# EAGLE board pcb (EAGLE 9.6.2)
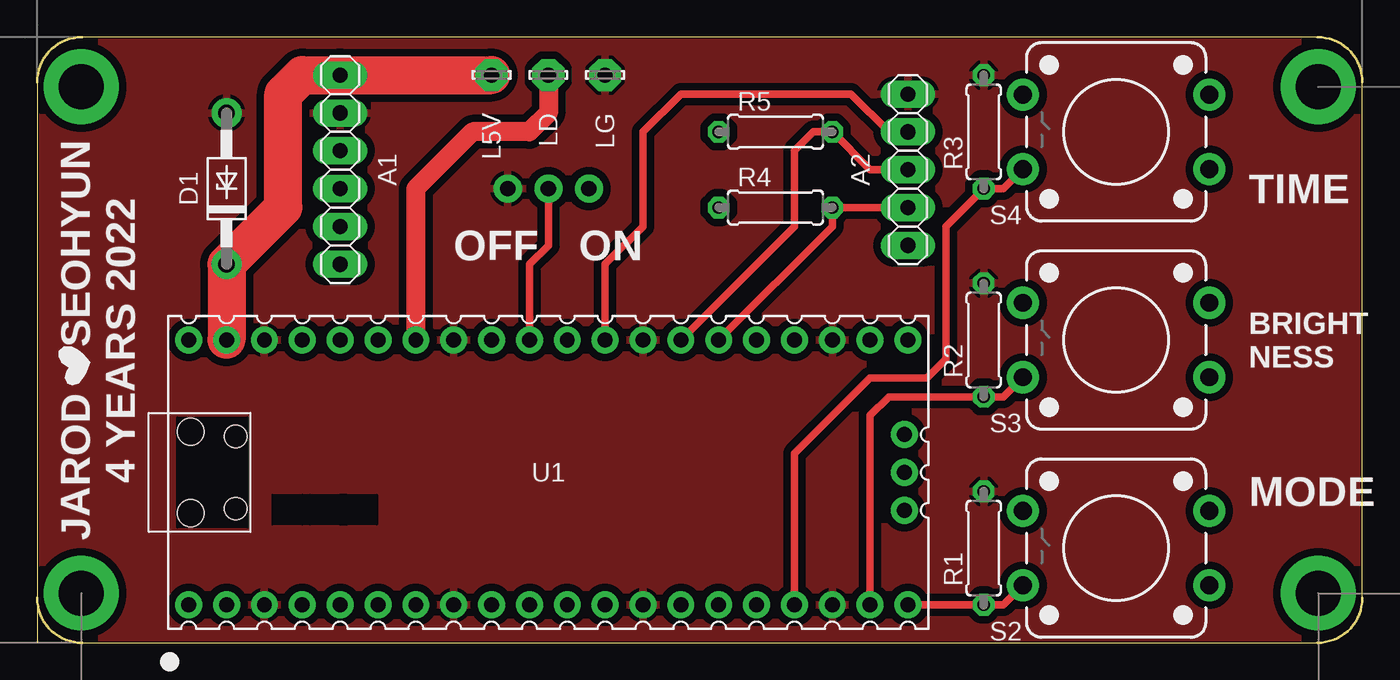
[diagram p0: board, top side]
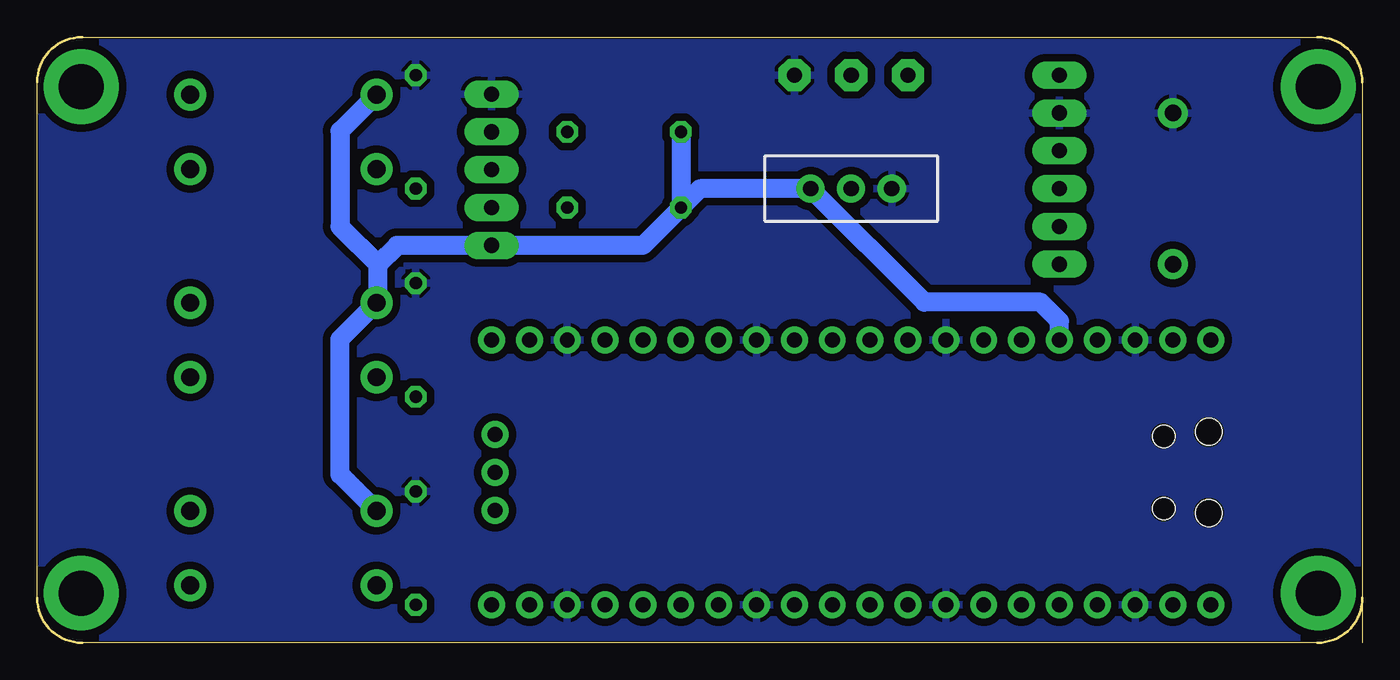
[diagram p1: board, bottom side, seen from below]

Size 88.9 x 40.64 mm. Coordinates in mm from the lower left corner, seen from the top.
Outline: 0,3 0,37.64 arc-90 3,40.64 85.9,40.64 arc-90 88.9,37.64 88.9,3 arc-90 85.9,0 3,0 arc-90 0,3
Outline: 0,3 0,0
Copper layers (1*16): Top 0.035mm / dielectric 1.6mm / Bottom 0.035mm
Design rules "jlcpcb-2layers *": minimum track width 5mil, minimum drill 0.3mm, track to track 20mil, track to pad 20mil, pad to pad 5mil, via to via 5mil, smd to smd 5mil, copper to edge 0.1mm, drill to drill 6mil, minimum pad ring 10mil, minimum via ring 3mil, stop-mask expansion 4mil, vias tented up to drill 0mil, thermal gap 10mil

## Footprints (pad centres in the part's own frame; a part is rotated, then mirrored left to right if it is on the bottom)
1X06 = drill 1.016 long: 1 -6.35,0; 2 -3.81,0; 3 -1.27,0; 4 1.27,0; 5 3.81,0; 6 6.35,0
1X05 = drill 1.016 long: 1 -5.08,0; 2 -2.54,0; 3 0,0; 4 2.54,0; 5 5.08,0
DO41Z10 = drill 1.118: A 5.08,0; C -5.08,0
LSP10 = drill 1.016 pad 2.159 octagon: MP 0,0
0207/7 = drill 0.813 octagon: 1 -3.81,0; 2 3.81,0
SWITCH_SPDT_PTH_11.6X4.0MM_LOCK = drill 1.016 pad 1.88: 1 0,2.718; 2 0,0; 3 0,-2.718
TACTILE_SWITCH_PTH_12MM = drill 1.2 pad 2.159: 1 6.25,-2.5; 2 -6.25,-2.5; 3 6.25,2.5; 4 -6.25,2.5
PICO-PKG-TH = drill 1: 1 -8.89,24.13; 2 -8.89,21.59; 3 -8.89,19.05; 4 -8.89,16.51; 5 -8.89,13.97; 6 -8.89,11.43; 7 -8.89,8.89; 8 -8.89,6.35; 9 -8.89,3.81; 10 -8.89,1.27; 11 -8.89,-1.27; 12 -8.89,-3.81; 13 -8.89,-6.35; 14 -8.89,-8.89; 15 -8.89,-11.43; 16 -8.89,-13.97; 17 -8.89,-16.51; 18 -8.89,-19.05; 19 -8.89,-21.59; 20 -8.89,-24.13; 21 8.89,-24.13; 22 8.89,-21.59; 23 8.89,-19.05; 24 8.89,-16.51; 25 8.89,-13.97; 26 8.89,-11.43; 27 8.89,-8.89; 28 8.89,-6.35; 29 8.89,-3.81; 30 8.89,-1.27; 31 8.89,1.27; 32 8.89,3.81; 33 8.89,6.35; 34 8.89,8.89; 35 8.89,11.43; 36 8.89,13.97; 37 8.89,16.51; 38 8.89,19.05; 39 8.89,21.59; 40 8.89,24.13; 41 -2.54,-23.9; 42 0,-23.9; 43 2.54,-23.9 | hole 1.8: -2.725,24; 2.725,24 | hole 1.5: -2.425,20.97; 2.425,20.97

## Placement (x,y rotation side)
A1  [1X06]  20.32,31.75 270 top
A2  [1X05]  58.42,31.75 90 top
D1  1N4728  [DO41Z10]  12.7,30.48 90 top
L5V  LSP10  [LSP10]  30.48,38.1 0 top
LD  LSP10  [LSP10]  34.29,38.1 0 top
LG  LSP10  [LSP10]  38.1,38.1 0 top
R1  [0207/7]  63.5,6.35 90 top
R2  [0207/7]  63.5,20.32 90 top
R3  [0207/7]  63.5,34.29 90 top
R4  [0207/7]  49.53,29.21 0 top
R5  [0207/7]  49.53,34.29 0 top
S1  [SWITCH_SPDT_PTH_11.6X4.0MM_LOCK]  34.29,30.48 90 bottom
S2  MOMENTARY-SWITCH-SPST-PTH-12MM  [TACTILE_SWITCH_PTH_12MM]  72.39,6.35 180 top
S3  MOMENTARY-SWITCH-SPST-PTH-12MM  [TACTILE_SWITCH_PTH_12MM]  72.39,20.32 180 top
S4  MOMENTARY-SWITCH-SPST-PTH-12MM  [TACTILE_SWITCH_PTH_12MM]  72.39,34.29 180 top
U1  RASPBERRY_PICOTH  [PICO-PKG-TH]  34.29,11.43 90 top

## Library data of the parts
A1 A2 = pinhead
D1 = diode
L5V LD LG = solpad
R1-R5 = rcl; SPICEPREFIX: R
S1 = SparkFun-Switches; PROD_ID: SWCH-08261; SF_SKU: COM-00102
S2-S4 = SparkFun-Switches; PROD_ID: SWCH-09185; SF_SKU: COM-09190
U1 = RpiPico

## Nets
3V3: A2.1 R4.1 R5.1 S1.1 S2.1 S3.1 S4.1 U1.36
GND: A1.2 A2.5 D1.A LG.MP R1.2 R2.2 R3.2 S1.3 U1.3 U1.8 U1.13 U1.18 U1.23 U1.28 U1.33 U1.38
INT: A2.4 U1.29
LEDDATA: LD.MP U1.34
SCL: A2.3 R5.2 U1.27
SDA: A2.2 R4.2 U1.26
SW1: S1.2 U1.31
SW2: R1.1 S2.3 U1.20
SW3: R2.1 S3.3 U1.19
SW4: R3.1 S4.3 U1.17
SWGND: U1.42
VBUS: U1.40
VCC: A1.1 D1.C L5V.MP U1.39

## Tracks (layer width: path | path; a pad name or v marks a point on that pad's centre or on a via)
3V3
  Bottom 1.27: R5.1 R4.1 | S4.1 68.58,34.35 68.58,27.94 66.04,25.4 | S2.1 68.58,11.29 68.58,20.38 S3.1 | S3.1 66.18,22.86 | R4.1 48.26,26.67 A2.1 64.77,26.67 66.04,25.4 | S3.1 66.04,22.92 66.04,25.4 | R4.1 44.45,30.48 S1.1 29.39,22.86 21.59,22.86 20.32,21.59 U1.36
GND
  pour Top: -1.27,43.18 91.44,43.18 91.44,-1.27 -2.54,-1.27 -2.54,43.18
  pour Bottom: -2.54,41.91 91.44,41.91 91.44,-2.54 -2.54,-2.54
INT
  Top 0.508: A2.4 57.15,34.29 54.61,36.83 43.18,36.83 40.64,34.29 40.64,27.94 38.1,25.4 U1.29
LEDDATA
  Top 1.27: LD.MP 34.29,35.56 33.02,34.29 29.21,34.29 25.4,30.48 U1.34
N$1  (via drill 3 pad 5)
  other vias: 2.95,37.32
N$2  (via drill 3 pad 5)
  other vias: 2.95,3.32
N$3  (via drill 3 pad 5)
  other vias: 85.95,3.32
N$4  (via drill 3 pad 5)
  other vias: 85.95,37.32
SCL
  Top 0.508: A2.3 55.88,31.75 R5.2 52.07,34.29 50.8,33.02 50.8,27.94 U1.27
SDA
  Top 0.508: A2.2 R4.2 53.34,27.94 U1.26
SW1
  Top 0.508: S1.2 34.29,26.67 33.02,25.4 U1.31
SW2
  Top 0.508: S2.3 64.83,2.54 R1.1 U1.20
SW3
  Top 0.508: S3.3 64.83,16.51 R2.1 57.15,16.51 55.88,15.24 U1.19
SW4
  Top 0.508: S4.3 64.83,30.48 R3.1 60.96,27.94 60.96,19.05 59.69,17.78 55.88,17.78 50.8,12.7 U1.17
VCC
  Top 2.54: U1.39 D1.C 16.51,29.21 16.51,36.83 17.78,38.1 A1.1 L5V.MP

## Text on the board
tPlace: TIME | OFF | ON | JAROD SEOHYUN / 4 YEARS 2022 | BRIGHT / NESS | MODE